# EAGLE board MM2_plates (EAGLE 7.4.0)
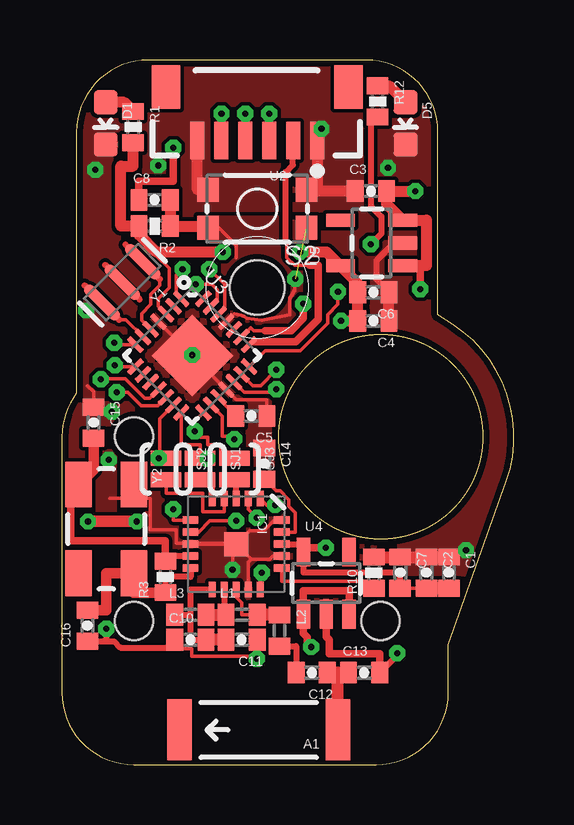
[diagram p0: board, top side]
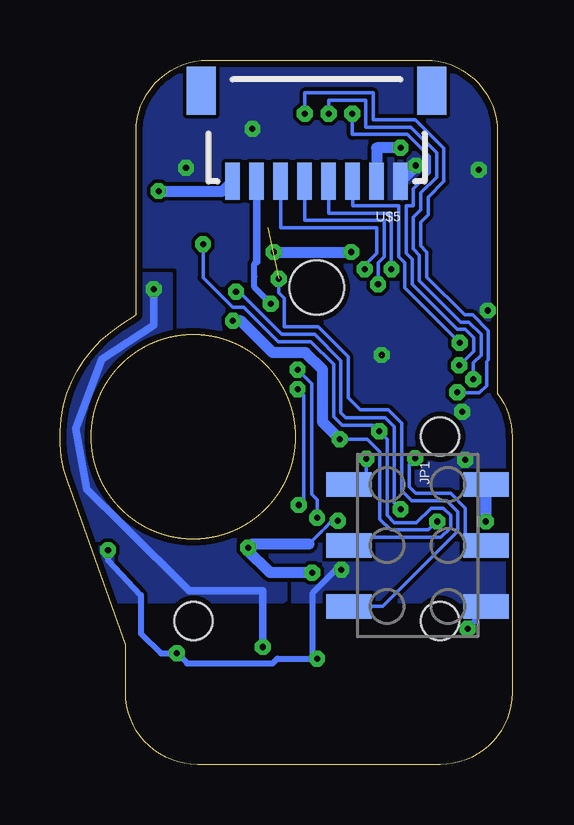
[diagram p1: board, bottom side, seen from below]

Size 18.83 x 29.36 mm. Coordinates in mm from the lower left corner, seen from the top.
Outline: 0,13.66 0,3 arc90 3,0 13.1,0 arc90 16.1,3 16.1,4.99 18.52,11.8 arc77 16.3,18.33 15.67,18.74 15.67,26.36 arc90 12.67,29.36 3.61,29.36 arc90 0.61,26.36 0.61,15.47 arc37 0,13.66
Outline: circle at 13.28,13.66 radius 4.26
Copper layers (1*16): Top 0.035mm / dielectric 1.5mm / Bottom 0.035mm
Design rules "default *": minimum track width 10mil, minimum drill 24mil, track to track 6mil, track to pad 6mil, pad to pad 6mil, via to via 6mil, smd to smd 6mil, copper to edge 10mil, drill to drill 8mil, minimum pad ring 10mil, minimum via ring 8mil, stop-mask expansion 4mil, vias tented up to drill 11mil, thermal gap 0mil
Holes 1.59 mm at 2.99,5.99 13.28,5.99 2.99,13.66
Holes 2.26 mm at 8.14,19.88

## Footprints (pad centres in the part's own frame; a part is rotated, then mirrored left to right if it is on the bottom)
ANTENNA-CHIP5 = smd 1.016 x 2.54: FEED -3.302,0; NC 3.302,0
0402-CAP = smd 0.7 x 0.9: 1 -0.65,0; 2 0.65,0
LED-0603 = smd 1 x 1: A 0,-0.877; C 0,0.877
QFN20 = smd 1 x 1: 0 0,0 | smd 0.65 x 0.3: 1 -1.9,1; 2 -1.9,0.5; 3 -1.9,0; 4 -1.9,-0.5; 5 -1.9,-1; 11 1.9,-1; 12 1.9,-0.5; 13 1.9,0; 14 1.9,0.5; 15 1.9,1 | smd 0.3 x 0.65: 6 -1,-1.9; 7 -0.5,-1.9; 8 0,-1.9; 9 0.5,-1.9; 10 1,-1.9; 16 1,1.9; 17 0.5,1.9; 18 0,1.9; 19 -0.5,1.9; 20 -1,1.9
2X3_SMD = smd 1.02 x 1.9: 1 -2.54,-2.85; 2 -2.54,2.85; 3 0,-2.85; 4 0,2.85; 5 2.54,-2.85; 6 2.54,2.85
C0402 = smd 0.7 x 0.9: 1 -0.65,0; 2 0.65,0
0402-RES = smd 0.7 x 0.9: 1 -0.65,0; 2 0.65,0
TACTILE_SWITCH_SMD_4.6X2.8MM = smd 0.9 x 1: 1 -2.05,-0.8; 2 2.05,-0.8; 3 2.05,0.8; 4 -2.05,0.8
PAD-JUMPER-2-NO_YES_SILK = smd 0.635 x 1.27: 1 -0.45,0; 2 0.45,0
EM406 = smd 0.6 x 1.55: 1 0,0; 2 1,0; 3 2,0; 4 3,0; 5 4,0; 6 5,0 | smd 1.2 x 1.8: P$1 -1.3,-2.225; P$2 6.3,-2.225
VQFN-28 = smd 0.82 x 0.24: 1 -2,1.35; 2 -2,0.9; 3 -2,0.45; 4 -2,0; 5 -2,-0.45; 6 -2,-0.9; 7 -2,-1.35; 15 2,-1.35; 16 2,-0.9; 17 2,-0.45; 18 2,0; 19 2,0.45; 20 2,0.9; 21 2,1.35 | smd 0.24 x 0.82: 8 -1.35,-2; 9 -0.9,-2; 10 -0.45,-2; 11 0,-2; 12 0.45,-2; 13 0.9,-2; 14 1.35,-2; 22 1.35,2; 23 0.9,2; 24 0.45,2; 25 0,2; 26 -0.45,2; 27 -0.9,2; 28 -1.35,2 | smd 2.4 x 2.4: PAD 0,0
SOT23-5 = smd 0.55 x 1.2: 1 -0.95,-1.3; 2 0,-1.3; 3 0.95,-1.3; 4 0.95,1.3; 5 -0.95,1.3
EB-85A = smd 0.6 x 1.55: 1 0,0; 2 1,0; 3 2,0; 4 3,0; 5 4,0; 6 5,0; 7 6,0; 8 7,0 | smd 1.2 x 2: P$1 -1.3,-3.775; P$2 8.3,-3.775
RESONATOR-SMD = smd 0.45 x 1.905: 1 -1.2,0; 2 0,0; 3 1.2,0
CRYSTAL-SMD-5X3 = smd 1.9 x 1.1: 1 -1.85,-1.15; 2 1.85,-1.15; 3 1.85,1.15; 4 -1.85,1.15

## Placement (x,y rotation side)
A1  ANTENNA2SMD5  [ANTENNA-CHIP5]  8.2,1.45 180 top
C1  10 uF  [0402-CAP]  16.12,8 270 top
C2  10 nF  [0402-CAP]  15.18,8 270 top
C3  10 uF  [0402-CAP]  12.87,23.9 0 top
C4  10 uF  [0402-CAP]  12.97,18.49 180 top
C5  0.1 uF  [0402-CAP]  7.89,14.53 180 top
C6  0.1 uF  [0402-CAP]  12.97,19.68 180 top
C7  1 nF  [0402-CAP]  14.09,8 270 top
C8  0.1 uF  [0402-CAP]  3.86,23.53 0 top
C10  2.2 nF  [0402-CAP]  5.35,5.2 0 top
C11  4.7 pF  [0402-CAP]  7.49,5.2 180 top
C12  1.5 pF  [0402-CAP]  10.41,3.83 180 top
C13  1.0 pF  [0402-CAP]  12.59,3.83 0 top
C14  33 nF  [0402-CAP]  8.43,12.55 270 top
C15  22 pF  [0402-CAP]  1.32,14.25 270 top
C16  22 pF  [0402-CAP]  1.06,5.79 90 top
D1  BLUE  [LED-0603]  1.82,26.72 180 top
D5  BLUE  [LED-0603]  14.32,26.72 180 top
IC1  NRF24L01SMD  [QFN20]  7.26,9.19 270 top
JP1  [2X3_SMD]  3.94,9.13 270 bottom
L1  8.2 nH  [C0402]  7.49,6.25 0 top
L2  3.9 nH  [C0402]  9.06,5.59 270 top
L3  2.7 nH  [C0402]  5.35,6.25 0 top
R1  10k  [0402-RES]  2.97,26.57 270 top
R2  10k  [0402-RES]  3.86,22.44 180 top
R3  1M  [0402-RES]  4.31,7.82 90 top
R10  22k  [0402-RES]  13,8 90 top
R12  330  [0402-RES]  13.15,27.63 270 top
S2  Reset  [TACTILE_SWITCH_SMD_4.6X2.8MM]  8.14,23.16 180 top
SJ1  JUMPER-PAD-2-NOYES_SILK  [PAD-JUMPER-2-NO_YES_SILK]  5.76,12.32 270 top
SJ2  JUMPER-PAD-2-NOYES_SILK  [PAD-JUMPER-2-NO_YES_SILK]  4.34,12.32 270 top
SJ3  JUMPER-PAD-2-NOYES_SILK  [PAD-JUMPER-2-NO_YES_SILK]  7.18,12.32 270 top
U2  EM406  [EM406]  10.64,26.01 180 top
U3  ATMEGA328P_VQFNVQFN  [VQFN-28]  5.43,17.04 315 top
U4  3.3V  [SOT23-5]  11.01,7.56 0 top
U5  5V  [SOT23-5]  12.9,21.74 90 top
U$5  EB-85ASMD  [EB-85A]  4.64,24.31 180 bottom
Y1  16MHZ  [RESONATOR-SMD]  2.51,20.1 225 top
Y2  16 MHz  [CRYSTAL-SMD-5X3]  1.85,9.82 270 top

## Library data of the parts
A1 IC1 = SparkFun-RF
C1-C8 C10-C16 L1-L3 R1-R3 R10 R12 SJ1-SJ3 = SparkFun-Passives
D1 D5 = SparkFun-LED; PROD_ID: DIO-08575
JP1 = SparkFun-Connectors; PROD_ID: CONN-11290
S2 = SparkFun-Electromechanical; PROD_ID: SWCH-13065
U2 U$5 = SparkFun-Connectors
U3 = SparkFun-DigitalIC
U4 = SparkFun-PowerIC; PROD_ID: VREG-00822
U5 = SparkFun-PowerIC; PROD_ID: VREG-00823
Y1 = SparkFun-FreqCtrl; PROD_ID: XTAL-08900
Y2 = SparkFun-FreqCtrl; PROD_ID: XTAL-08218

## Nets
3.3V: C1.2 C2.2 C7.2 IC1.7 IC1.15 IC1.18 U4.5
5V: C4.2 C6.2 JP1.2 R1.2 R2.2 U3.3 U3.16 U5.5
CE: IC1.1 U3.19
CSN: IC1.2 U3.20
CURRENT_SENSE1: U3.23 U$5.7
CURRENT_SENSE2: U2.2 U3.22
DTR: C8.1 U$5.2
GND: C1.1 C2.1 C3.1 C4.1 C5.1 C6.1 C7.1 C10.1 C11.1 C13.2 C14.1 C15.1 C16.1 D1.C D5.C IC1.0 IC1.8 IC1.14 IC1.17 IC1.20 JP1.6 R10.2 S2.1 S2.2 U2.1 U2.6 U3.4 U3.18 U3.PAD U4.2 U5.2 U$5.1 Y1.2
HIP: U2.3 U3.12
IRQ: IC1.6 U3.21
MISO: JP1.1 SJ1.1 U3.14
MOSI: JP1.4 SJ2.1 U3.13
N$6: U3.5 Y1.1
N$7: U3.6 Y1.3
N$8: D1.A R1.1
N$10: IC1.12 L1.1 L3.2
N$11: C5.2 U3.17
N$12: IC1.13 L1.2 L2.1
N$19: C12.2 L2.2
N$20: D5.A R12.1
N$22: A1.FEED C12.1 C13.1
N$23: IC1.3 SJ3.2
N$24: C10.2 C11.2 IC1.11 L3.1
N$25: C14.2 IC1.19
N$26: IC1.16 R10.1
N$27: IC1.4 SJ2.2
N$28: C15.2 IC1.9 R3.2 Y2.1
N$29: C16.2 IC1.10 R3.1 Y2.3
N$30: IC1.5 SJ1.2
RESET: C8.2 JP1.5 R2.1 S2.3 S2.4 U3.25
RXI: U3.26 U$5.6
SCK: JP1.3 R12.2 SJ3.1 U3.15
SERVOB1: U2.5 U3.8
SERVOB2: U2.4 U3.11
SERVOT1: U3.1 U$5.4
SERVOT2: U3.7 U$5.3
TXO: U3.27 U$5.5
VIN: C3.2 U4.1 U4.3 U5.1 U5.3 U$5.8

## Tracks (layer width: path | path; a pad name or v marks a point on that pad's centre or on a via)
3.3V  (via drill 0.25)  (1 unrouted)
  Top 0.152: C7.2 C2.2 | IC1.7 5.7,9.69 6.17,10.16 v7.26,10.16 | IC1.15 8.26,7.93 v8.33,8
  Top 0.254: C7.2 14.09,8 10.08,8 | 10.08,8 10.06,8 | IC1.18 10.06,9.19 U4.5 | 10.08,8 10.08,8.84 10.08,9.04 v10.99,9.04
  Top 0.305: 10.08,8.84 U4.5 10.24,9.04 v10.99,9.04
  Top 0.508: C1.2 C2.2
  Bottom 0.127: 7.78,9.88 7.93,9.73
  Bottom 0.152: v7.26,10.16 7.5,10.16 7.78,9.88 | 7.93,9.73 8.47,9.19
  Bottom 0.305: 10.08,8 10.08,8.13
  Bottom 0.457: v8.33,8 10.08,8 11.04,8.96 10.82,9.19 8.47,9.19
5V  (via drill 0.25)
  Top 0.152: U3.16 6.68,14.52 6.68,13.69 7.06,13.69 v7.18,13.56 | U3.3 4.01,19.1 4.01,19.4 4.47,19.86 4.47,20.67 3.93,21.21 3.93,21.36
  Top 0.457: v11.63,18.49 C4.2 C6.2 12.32,20.07 U5.5 11.03,21.36 v9.93,21.36 | R1.2 2.97,24.94 2.46,24.94 2.46,22.44 R2.2 3.21,22.08 3.93,21.36 v6.7,21.36
  Top 0.475: v3.12,10.13 v1.09,10.13
  Bottom 0.152: v7.18,13.56 6.04,13.56 5.51,13.03 5.51,10.23 5.05,9.78 3.5,9.78 v3.12,10.13
  Bottom 0.457: v7.18,13.56 7.89,14.27 7.89,16.46 8.61,17.17 9.98,17.17 11.3,18.49 v11.63,18.49 | v9.93,21.36 v6.7,21.36
  Bottom 0.475: v1.09,10.13 JP1.2
CE  (via drill 0.25)
  Top 0.152: U3.19 7.59,15.52 8.81,15.52 v8.94,15.64 | IC1.1 8.53,10.82 v8.89,10.82
  Bottom 0.152: v8.94,15.64 8.68,15.39 8.68,10.79 8.71,10.82 v8.89,10.82
CSN  (via drill 0.25)
  Top 0.152: U3.20 7.95,15.8 8.28,15.8 v8.94,16.46 | v8.12,10.28 7.76,10.65 IC1.2
  Bottom 0.152: v8.94,16.46 8.35,15.87 8.35,11.28 8.12,11.05 v8.12,10.28
CURRENT_SENSE1  (via drill 0.25)
  Top 0.152: U3.23 7.87,18.21 8,18.08 8.48,18.08
  Top 0.305: v10.05,19.2 10.05,18.59 9.55,18.08 8.48,18.08
  Bottom 0.254: 10.64,20.96 10.74,20.86 10.74,20.34 10.74,19.89 v10.05,19.2
  Bottom 0.305: 10.64,20.96 U$5.7
CURRENT_SENSE2
  Top 0.152: U3.22 7.92,17.63 8.02,17.63 | 10.33,20.8 9.7,20.8 9.37,21.13 9.37,21.77
  Top 0.254: 9.37,21.77 9.32,21.82 9.32,24.69 9.62,24.99 9.62,25.99 U2.2
  Top 0.305: 8.02,17.63 9.75,17.63 10.69,18.57 10.69,20.8 10.33,20.8
DTR  (via drill 0.25)
  Top 0.305: C8.1 3.21,24.31 4.64,24.31 v4.64,25.7
  Bottom 0.457: v4.64,25.7 5.64,25.7 U$5.2
GND  (via drill 0.25)  (1 unrouted)
  Top 0.152: C10.1 4.7,4.82 5.41,4.82 5.41,4.52 8.14,4.52 C11.1 | U3.PAD U3.18 7.26,15.21 8.54,15.21 C5.1 | U3.PAD | U3.4 U3.PAD | U3.PAD | IC1.0 7.82,9.75 8.4,9.75 8.84,10.19 IC1.20 | C15.1 1.32,15.54 1.06,15.8 | IC1.8 IC1.0 | IC1.17 8.79,8.69 8.66,8.56 7.89,8.56 | 7.89,8.56 IC1.0 | IC1.14 7.76,8.42 7.89,8.56 | v7.11,8.13 7.11,9.22 4.77,9.22 4.77,9.78 3.68,9.78 3.68,11.1 2,11.1
  Top 0.254: C16.1 1.7,5.14 | 1.7,5.14 2.17,5.14 2.43,4.87 4.37,4.87 C10.1 | R10.2 16.04,8.65 v16.84,8.94 | C6.1 13.1,20.22 13.1,21 13.84,21.74 U5.2 | v1.85,5.66 1.85,5.22 1.7,5.14 | 8.14,4.52 8.14,4.43 v8.12,4.42 8.12,5.19 C11.1 | C13.2 13.97,4.55 v13.97,4.65
  Top 0.305: C13.2 13.24,4.62 11.15,4.62 11.15,5.2 11.01,5.34 U4.2
  Top 0.457: C3.1 10.71,23.9 | 10.71,23.9 10.25,23.9 S2.1 | U2.1 10.64,23.98 10.71,23.9 | C4.1 C6.1 | S2.2 5.64,23.96 U2.6
  Top 0.508: R10.2 C7.1 C2.1 C1.1
  Bottom 0.254: v16.84,8.94 16.84,8.53 15.46,7.06 15.46,5.46 14.63,4.62 14.6,4.65 v13.97,4.65 13.53,4.21 9.98,4.21 9.77,4.42 v8.12,4.42 8.3,4.6 8.3,7.16 7.34,8.13 v7.11,8.13 | JP1.6 1.09,6.5 v1.85,5.66
  Bottom 0.457: U$5.1 4.01,24.94 v4.01,24.97
  other vias: 1.01,18.92 1.39,24.79 13.58,24.86 10.82,26.49 5.43,17.07 2.08,14.7 1.95,12.7
  pour Top (rank 2): 0.1,30.86 20.95,30.86 20.85,30.76 20.85,6.65 20.7,6.8 -0.82,6.8 -0.59,7.03 -0.59,15.39 0.1,16.08
  pour Bottom (rank 2): 20.16,30.88 -0.69,30.88 -0.59,30.78 -0.59,6.68 -0.44,6.83 21.08,6.83 20.85,7.06 20.85,15.42 20.16,16.1
  pour Top: 2.79,11.55 2.81,11.58 4.49,11.58 5.15,10.92 5.15,8.94 3.78,8.94 2.79,9.93
HIP  (via drill 0.25)
  Top 0.152: U3.12 3.98,14.96 3.3,14.96 2.74,15.52 v2.28,15.52 | v8.63,27.12 v8.64,27.12 U2.3
  Bottom 0.152: v2.28,15.52 2.21,15.49 1.37,15.49 1.06,15.8 1.06,16.79 0.99,16.86 0.99,18.08 1.65,18.74 1.98,18.74 3.55,20.32 3.55,21.36 3.81,21.61 3.81,22.6 3.5,22.91 3.5,23.65 2.84,24.31 2.84,25.68 4.03,26.87 5.79,26.87 5.79,27.99 8.63,27.99 v8.63,27.12
IRQ  (via drill 0.25)
  Top 0.152: IC1.6 4.64,10.19 v4.64,10.64 | U3.21 8.46,17.24 9.93,17.24 11.07,18.39 11.07,18.74 11.5,19.17 v11.5,19.71
  Bottom 0.152: v4.64,10.64 4.9,10.89 4.9,14.07 5.28,14.45 6.93,14.45 7.13,14.65 7.13,16.84 8.22,17.93 9.6,17.93 11.37,19.71 v11.5,19.71
MISO  (via drill 0.25)
  Top 0.152: U3.14 4.97,13.33 5.76,13.33 SJ1.1 5.63,12.77 v6.07,12.75
  Bottom 0.152: JP1.1 6.07,11.65 v6.07,12.75
MOSI  (via drill 0.25)
  Top 0.152: U3.13 4.08,14.42 4.08,12.77 SJ2.1 v4.03,12.77
  Bottom 0.152: JP1.4 1.95,9.13 1.95,10.69 2.56,11.3 4.01,11.3 4.29,11.58 4.29,12.52 v4.03,12.77
N$6
  Top 0.152: U3.5 3.32,18.51 3.32,18.79 3.7,19.17 3.7,19.61 4.08,19.98 4.08,20.23
N$7
  Top 0.152: 2.38,18.54 2.66,18.54 U3.6
N$8
  Top 0.457: R1.1 2.59,27.6 D1.A
N$10
  Top 0.254: IC1.12 6.76,6.32 L1.1
  Top 0.508: L3.2 L1.1
N$11
  Top 0.152: U3.17 6.53,15.25 C5.2
N$12
  Top 0.152: 8.14,6.24 7.49,6.24 7.49,6.75 7.26,6.98 IC1.13
  Top 0.508: L2.1 8.14,6.24 L1.2
N$19
  Top 0.254: L2.2 9.76,4.94 C12.2
N$20
  Top 0.457: R12.1 13.63,28.28 D5.A
N$22
  Top 0.254: C12.1 C13.1
  Top 0.508: A1.FEED 11.5,3.83 C12.1
N$23
  Top 0.254: IC1.3 7.26,11.87 SJ3.2
N$24
  Top 0.254: L3.1 5.35,6.25 | 5.35,6.25 5.35,5.2 C10.2 | IC1.11 5.35,7.29 5.35,6.25
  Top 0.508: C11.2 C10.2
N$25
  Top 0.152: IC1.19 9.72,9.69 9.72,10.49 9.44,10.77 9.44,11.05 9.09,11.4 8.92,11.4 C14.2 8.68,12.12
N$26
  Top 0.152: IC1.16 9.16,7.64 13,7.64 R10.1
N$27
  Top 0.152: IC1.4 6.76,10.54 5.86,10.54 5.86,11.3 4.34,11.3 SJ2.2
N$28
  Top 0.254: IC1.9 4.31,8.69 R3.2
  Top 0.305: R3.2 4.31,9.32 0.7,9.32 0.38,9.32 0.38,11.2
  Top 0.432: Y2.1 1.32,12.29 C15.2
  Top 0.457: 0.38,11.2 0.7,11.2 Y2.1
N$29
  Top 0.254: IC1.10 5.36,7.82 4.31,7.82 R3.1
  Top 0.432: C16.2 1.85,6.44 1.85,7.97 Y2.3 3,7.17 R3.1
N$30
  Top 0.254: IC1.5 6.26,11.87 SJ1.2
RESET  (via drill 0.25)  (1 unrouted)
  Top 0.152: U3.25 7.18,18.79 7.46,18.72 7.62,18.67 7.69,18.59 8.33,18.51 9.49,18.74 9.49,19.43 9.7,19.76 v9.72,20.24 | 7.26,21.13 7.26,21.64 6.54,22.36 S2.3
  Top 0.457: C8.2 R2.1 6.01,22.44 S2.3
  Bottom 0.152: JP1.5 5.39,6.59 2.26,9.73 2.26,10.54 2.71,11 4.19,11 4.59,11.4 4.59,14.22 5.15,14.78 6.32,14.78 6.83,15.29 6.83,16.99 8.07,18.23 9.49,18.23 9.49,19.43 9.72,19.66 v9.72,20.24
  pour Top: 6.29,22.83 9.52,22.83 9.98,22.38 9.98,17.85 9.75,17.63 9.16,17.63 9.14,17.6 6.57,17.6 6.29,17.88
RXI  (via drill 0.25)
  Top 0.152: U3.26 6.78,19.02 6.78,20.01 v6.14,20.65
  Bottom 0.152: v6.14,20.65 6.14,20.8 5.63,21.31 5.63,22.38 9.64,22.38 U$5.6
SCK  (via drill 0.25)
  Top 0.152: 7.26,12.92 SJ3.1 6.81,12.77 6.62,12.95 6.62,13.31 6.6,13.33 6.07,13.33 6.07,13.64 5.79,13.64 v5.53,13.89 5.53,14.31 U3.15
  Top 0.254: R12.2 12.87,26.98 12.87,23.26 13.3,22.83 13.3,22.12 v12.87,21.69
  Bottom 0.152: v12.87,21.69 12.87,20.29 11.63,19.05 11.17,19.05 9.75,17.63 8.38,17.63 7.44,16.69 7.44,14.5 7.08,14.15 5.79,14.15 v5.53,13.89 5.2,13.56 5.2,10.39 4.9,10.08 3.98,10.08 3.37,10.69 2.87,10.69 2.56,10.39 2.56,9.88 2.97,9.47 6.45,9.47 JP1.3
SERVOB1  (via drill 0.25)
  Top 0.152: U3.8 2.26,16.58 v2.21,16.63 | U2.5 v6.65,27.12
  Bottom 0.152: v2.21,16.63 2.18,16.63 1.6,17.22 1.6,17.78 1.95,18.13 2.28,18.13 4.16,20.01 4.16,21.05 4.41,21.31 4.41,23.29 4.11,23.29 4.11,24 3.45,24.66 3.45,25.35 4.36,26.26 6.65,26.26 v6.65,27.12
SERVOB2  (via drill 0.25)
  Top 0.152: U3.11 3.65,15.26 3.45,15.26 2.64,16.08 1.72,16.08 v1.62,16.05 | v7.64,27.12 U2.4
  Bottom 0.152: v1.62,16.05 1.62,16.74 1.29,17.07 1.29,17.93 1.8,18.44 2.13,18.44 3.86,20.17 3.86,21.23 4.11,21.49 4.11,22.81 3.81,23.11 3.81,23.82 3.14,24.48 3.14,25.5 4.21,26.57 6.09,26.57 6.09,27.68 7.64,27.68 v7.64,27.12
SERVOT1  (via drill 0.25)
  Top 0.152: U3.1 4.77,19.61 4.77,20.39 v5.02,20.65
  Bottom 0.152: v5.02,20.65 5.02,22.98 7.64,22.98 U$5.4
SERVOT2  (via drill 0.25)
  Top 0.152: U3.7 2.25,17.5 v2.18,17.57
  Bottom 0.152: U$5.3 6.64,23.29 4.72,23.29 4.72,21.16 4.47,20.9 4.47,19.86 v2.18,17.57
TXO  (via drill 0.25)
  Top 0.152: U3.27 6.47,19.36 6.47,19.78 6.24,20.01 v5.58,20.01
  Bottom 0.152: v5.58,20.01 5.58,20.9 5.33,21.16 5.33,22.68 8.64,22.68 U$5.5
VIN  (via drill 0.25)
  Top 0.305: U4.3 11.96,7.24 10.06,7.24 U4.1 10.06,5.48 10.23,5.31 10.23,5.05 v10.38,4.9 | 15.18,20.79 14.93,20.79 v14.93,19.81
  Top 0.457: U5.1 15.18,20.79 15.18,22.69 U5.3 13.52,23.37 C3.2 v14.73,23.9
  Bottom 0.305: v14.93,19.81 14.93,18.31 17.09,16.89 18.18,13.99 17.72,11.48 16.18,9.95 13.46,7.24 10.38,7.24 v10.38,4.9
  Bottom 0.457: v14.73,23.9 12.05,23.9 U$5.8
  pour Bottom: 14.24,20.42 14.27,20.39 18.08,20.39 19.53,18.95 19.53,11.02 19.55,11 19.55,7.11 19.3,6.86 9.52,6.86 9.47,6.91 9.47,10.77 14.24,15.54